# Altium PCB ISL6236A.PcbDoc
Units mm, origin at the board's own origin, x right, y up, seen from the top; angles counter-clockwise.
Board outline 50 x 50 mm, 6 copper layers (L1, L2, L3, L4, L5, L6); 41 components, 27 nets, 119 pads, 104 vias.
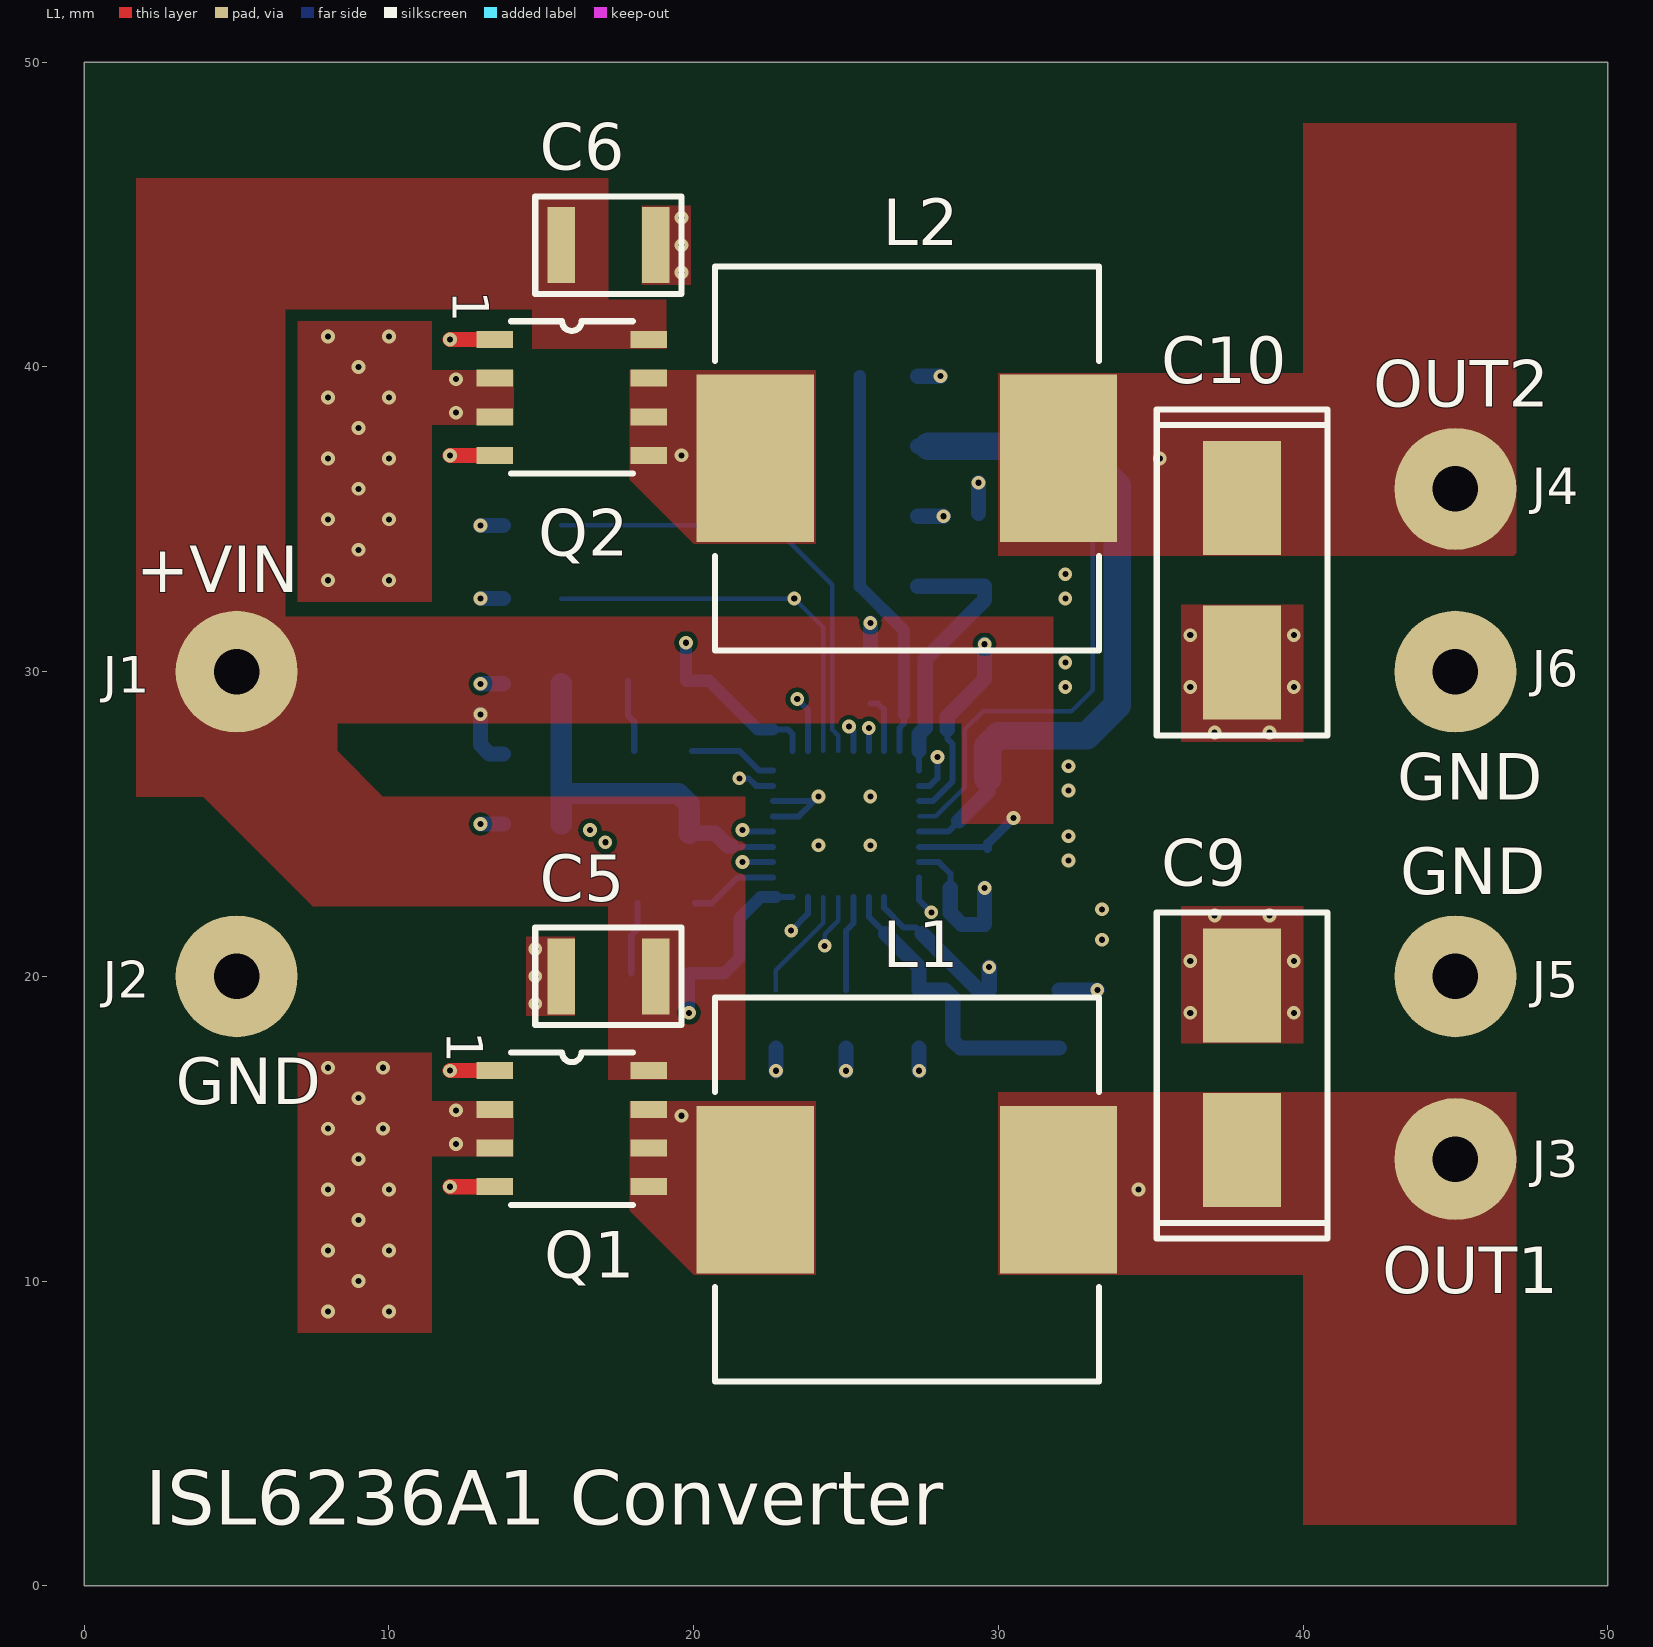
[diagram p0: L1 view]
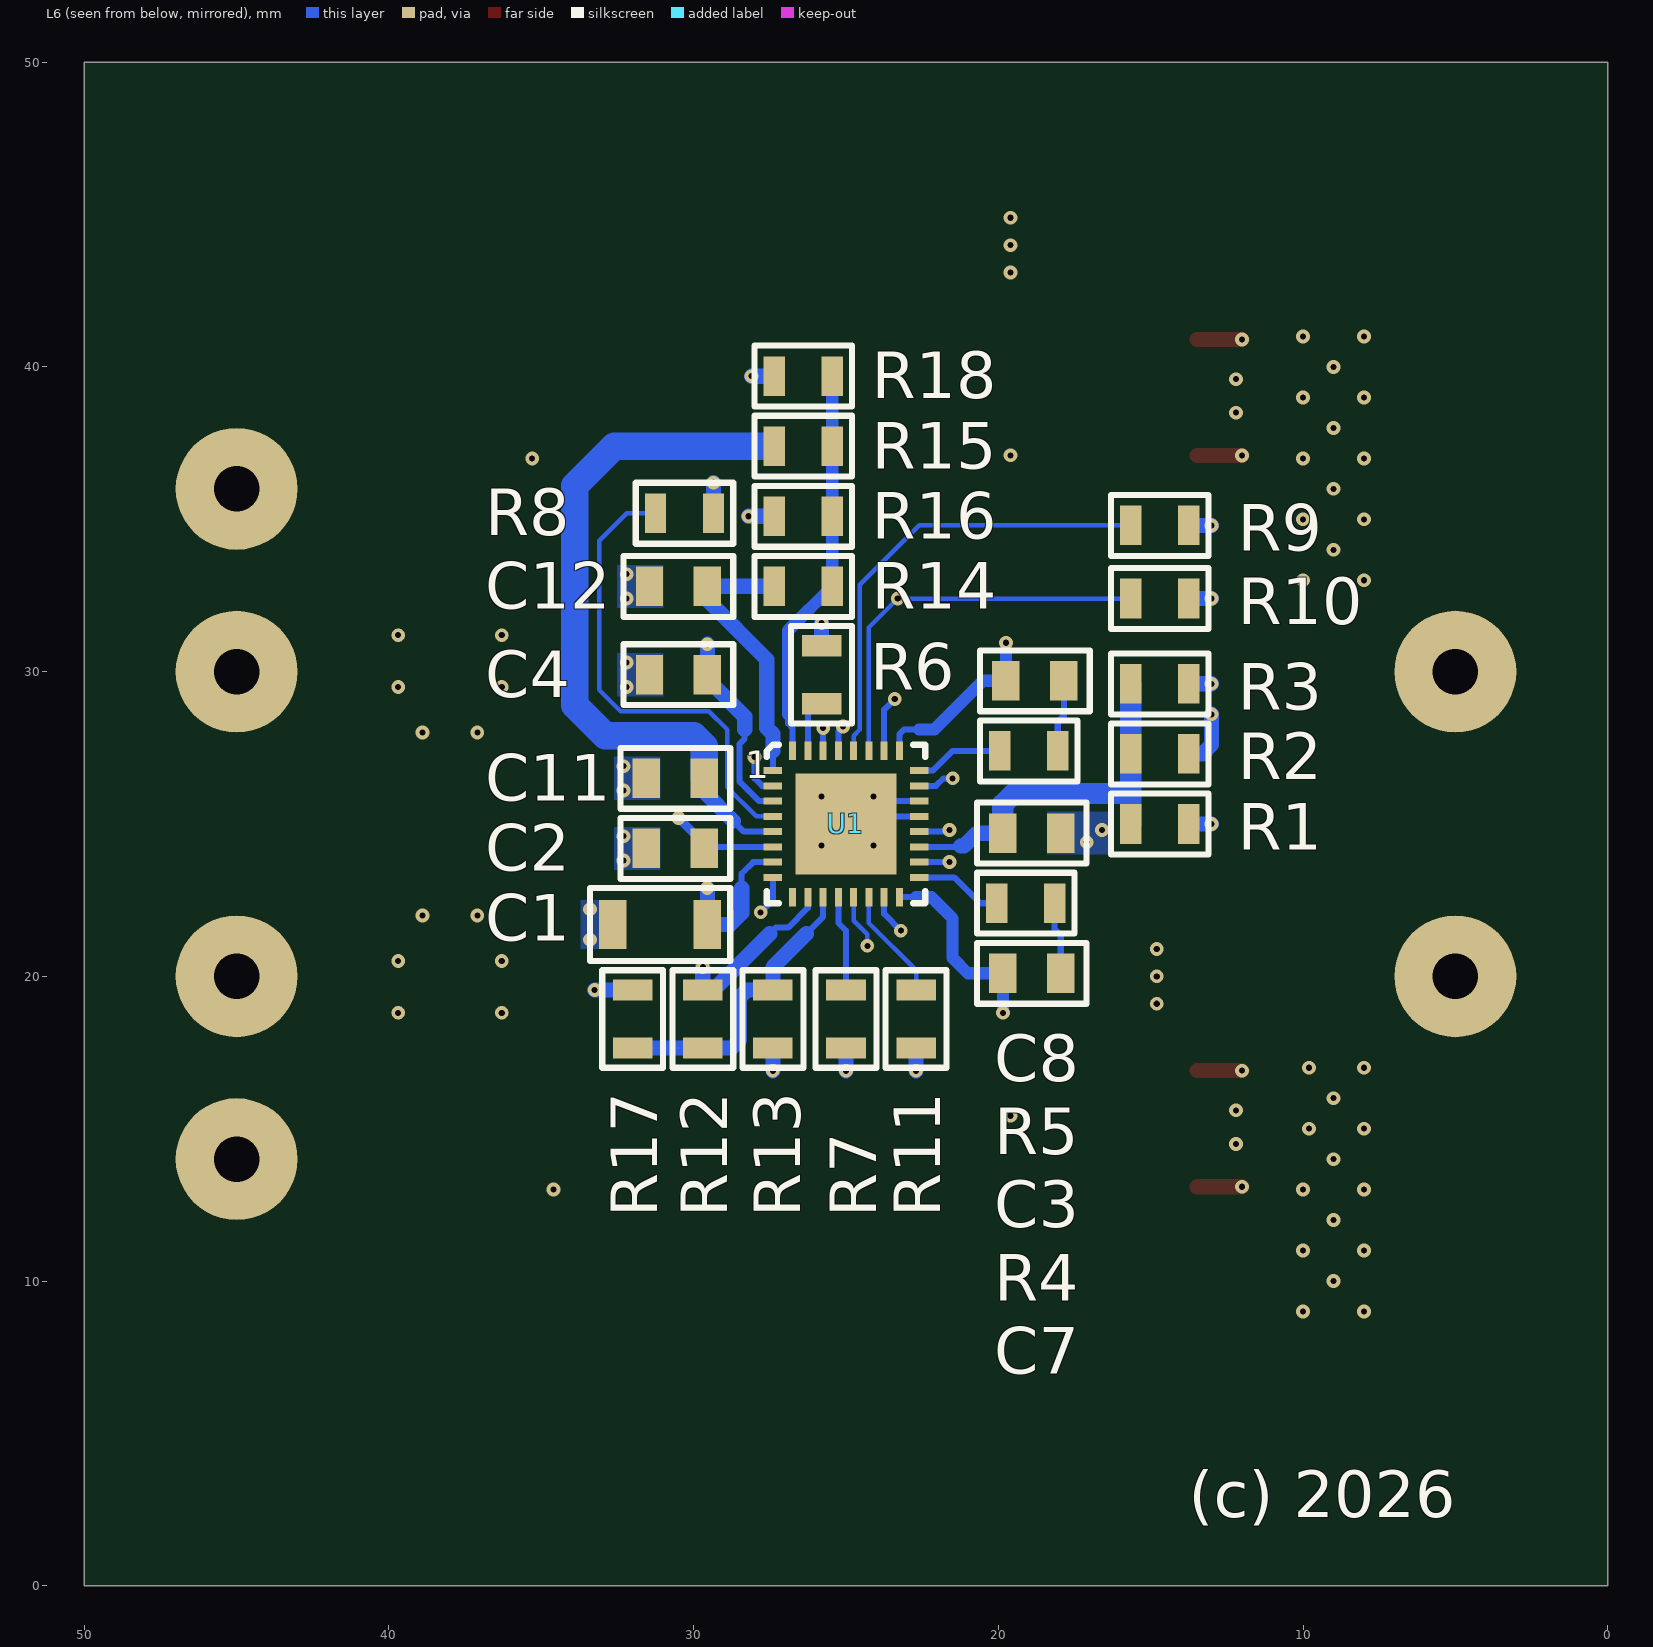
[diagram p1: L6 view, seen from below]
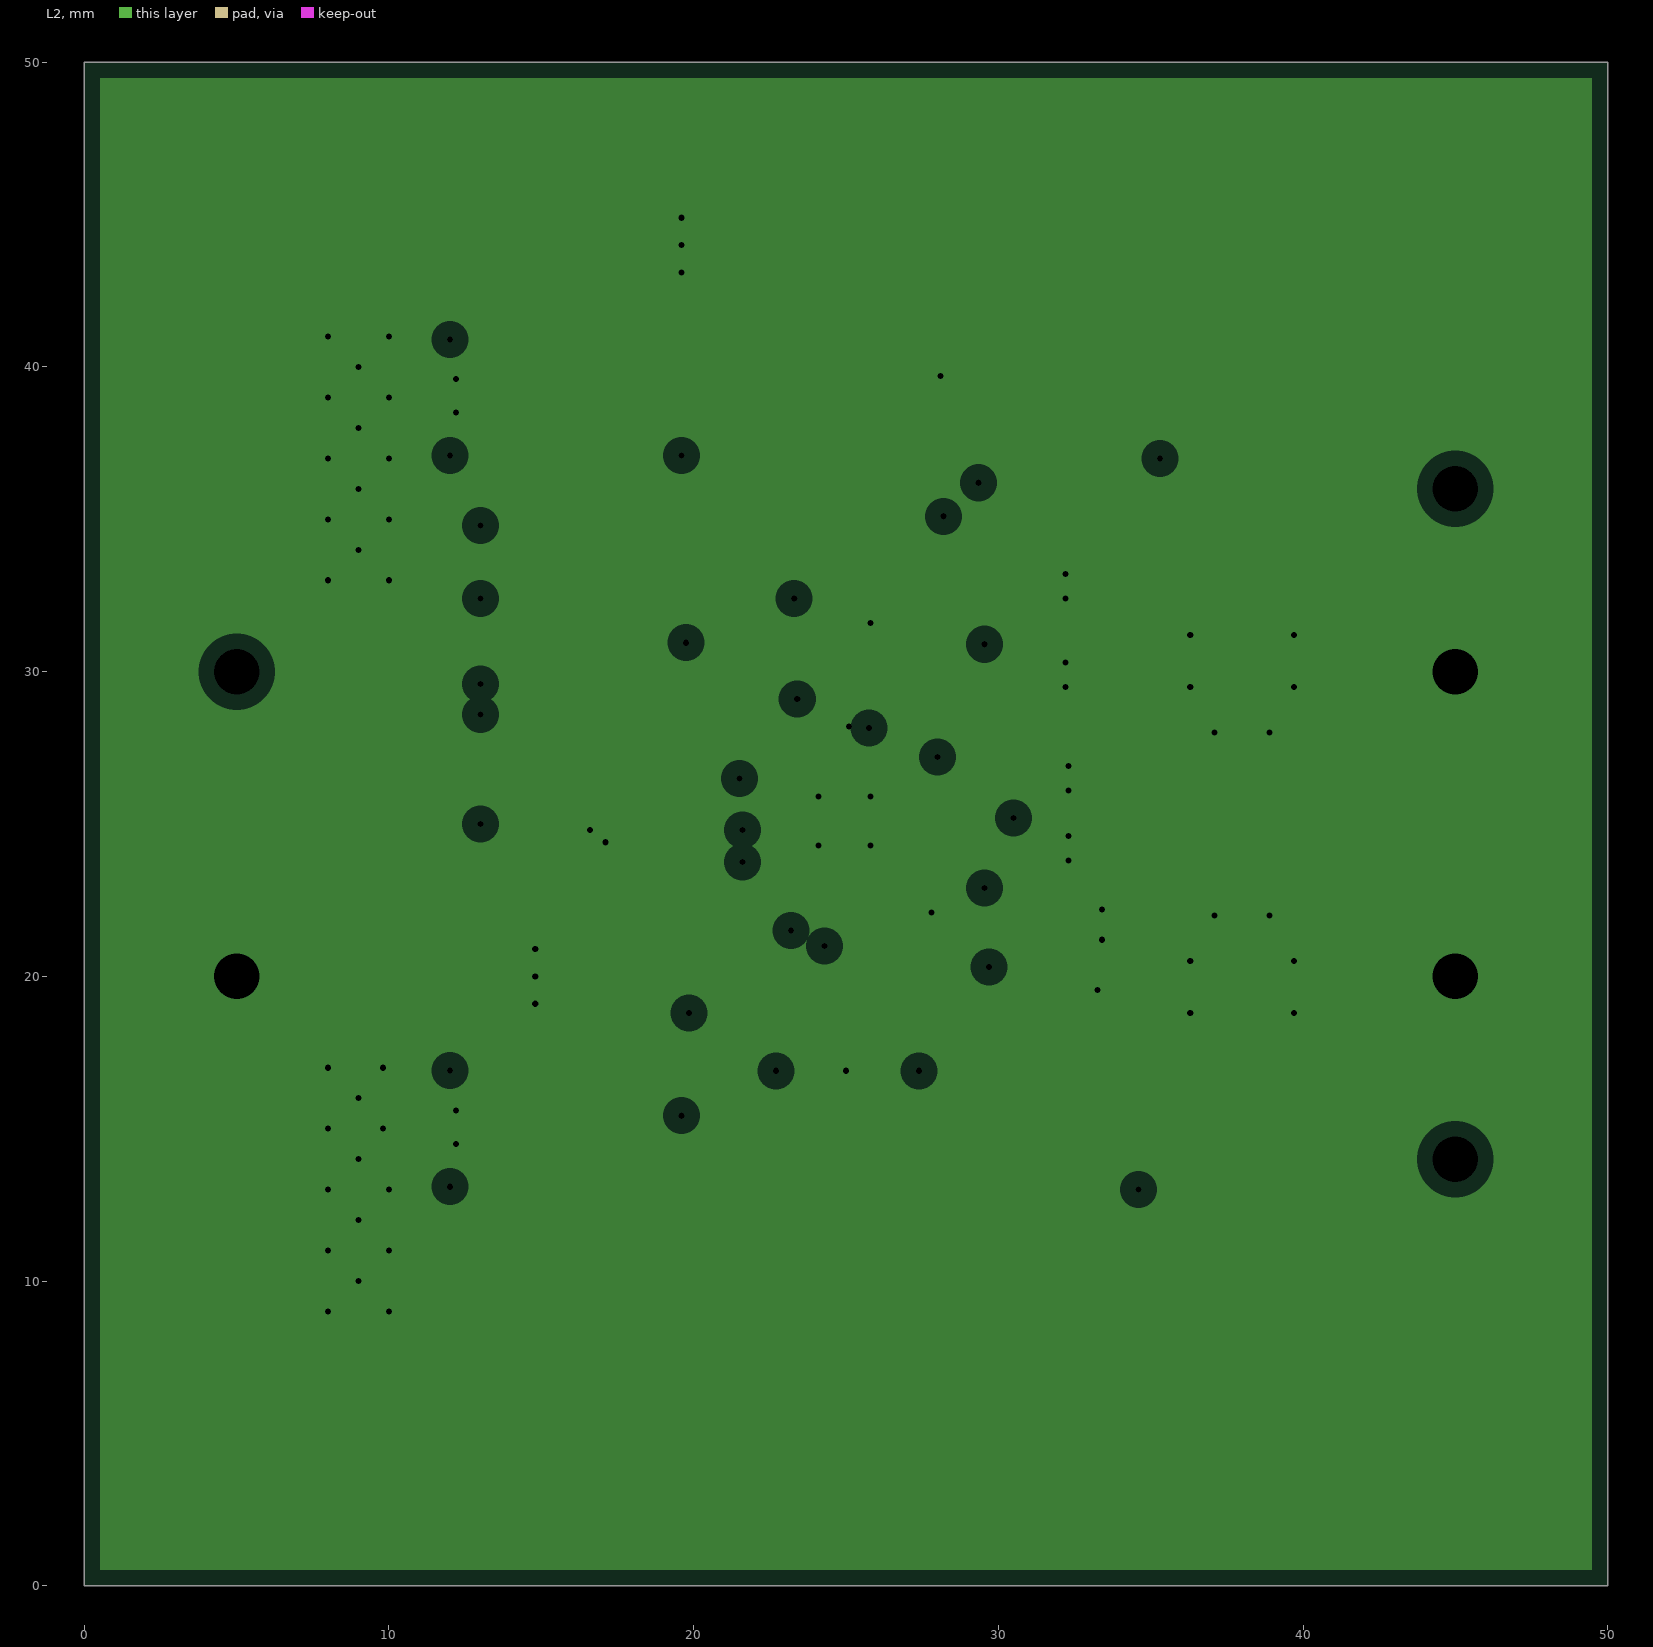
[diagram p2: L2, clearances drawn from the general rule]
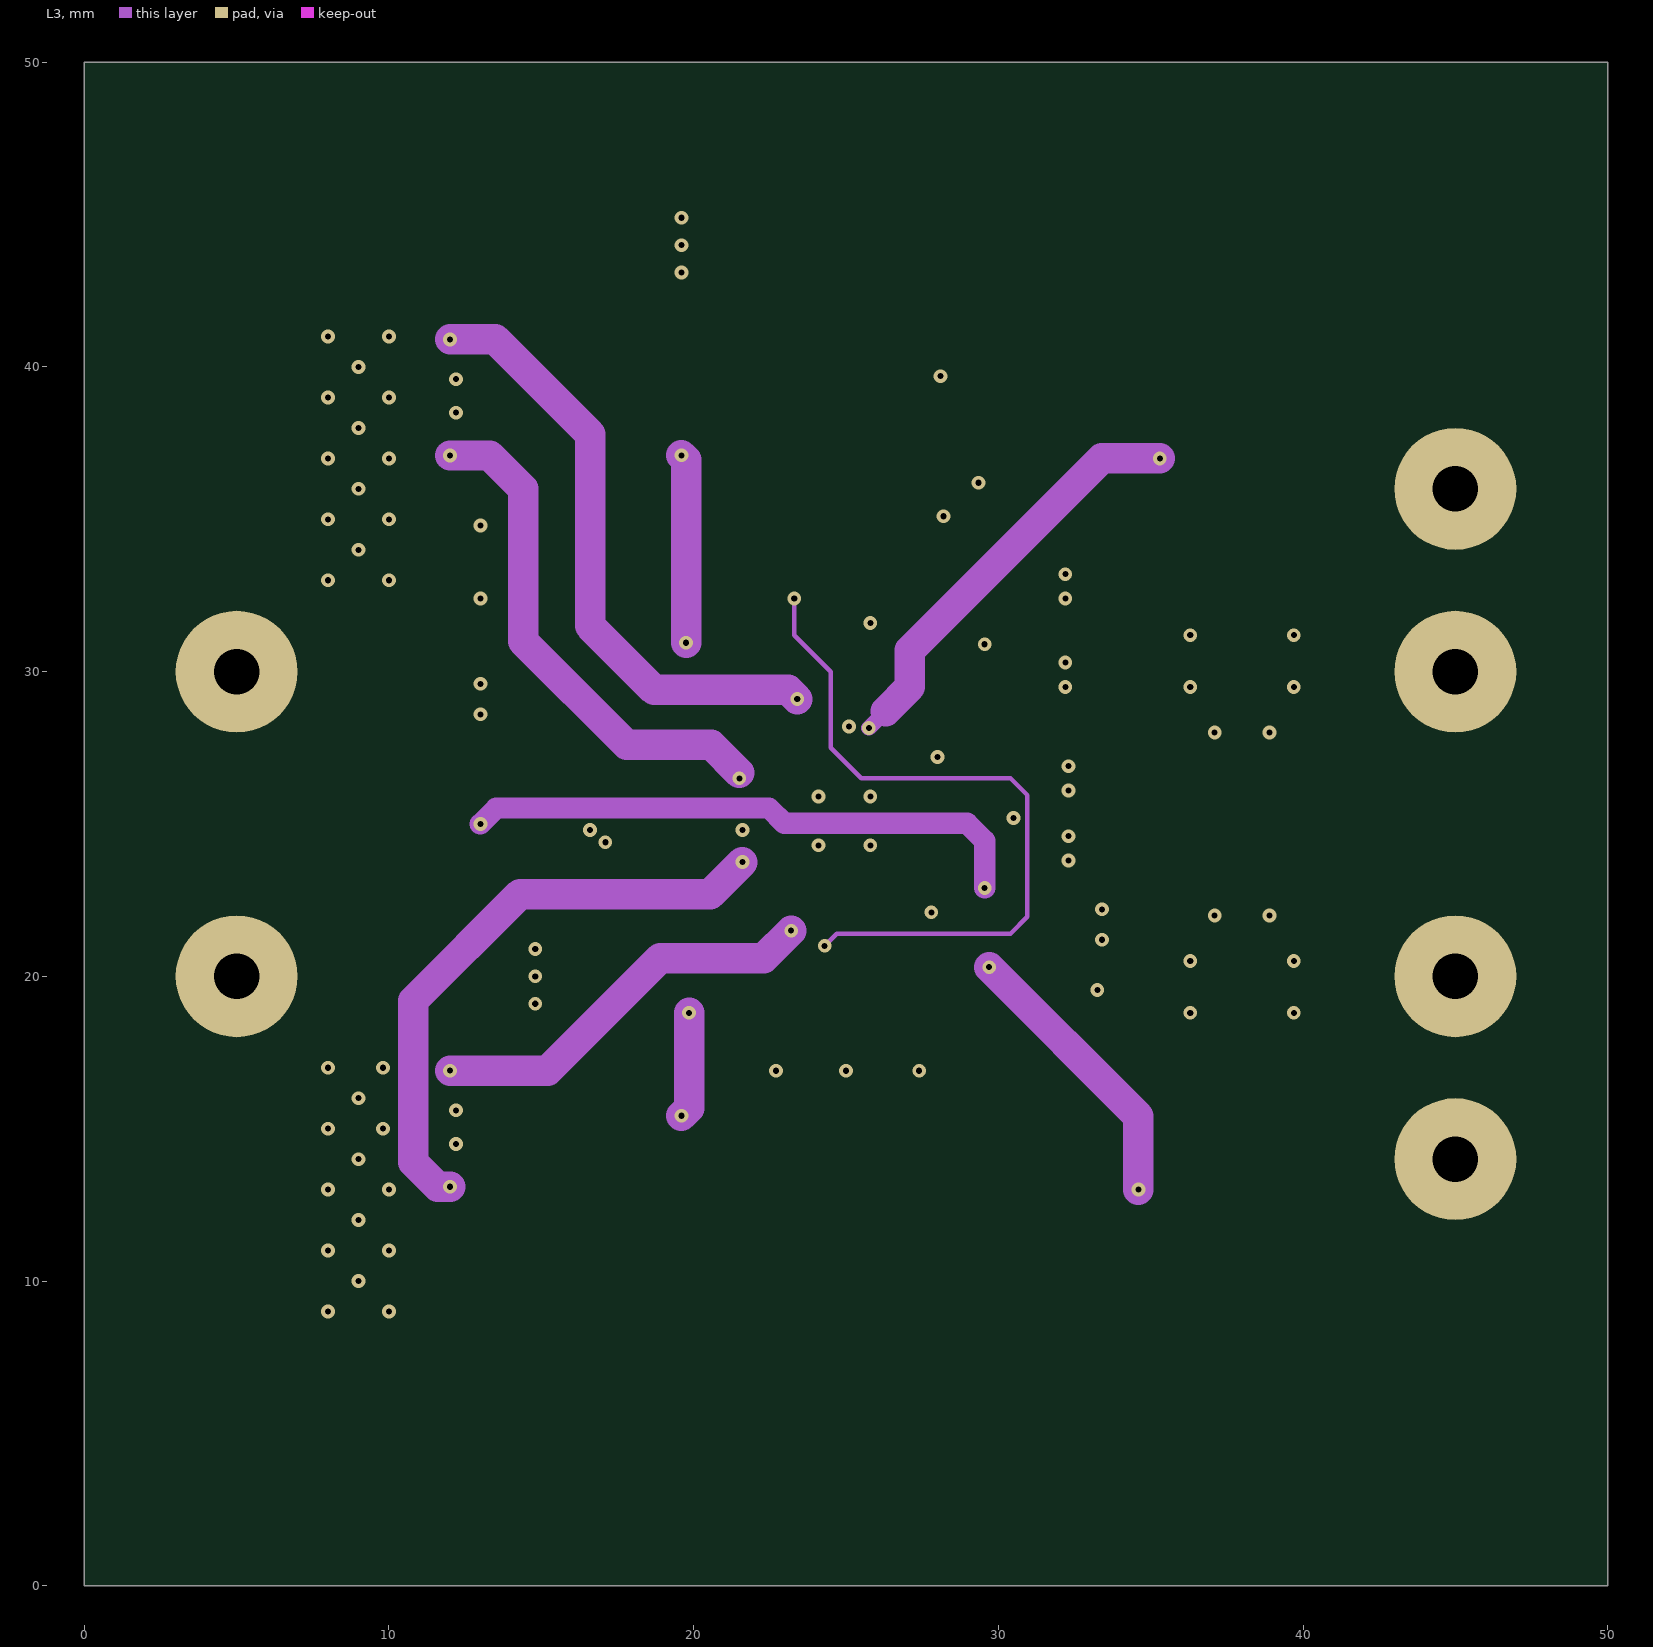
[diagram p3: L3]
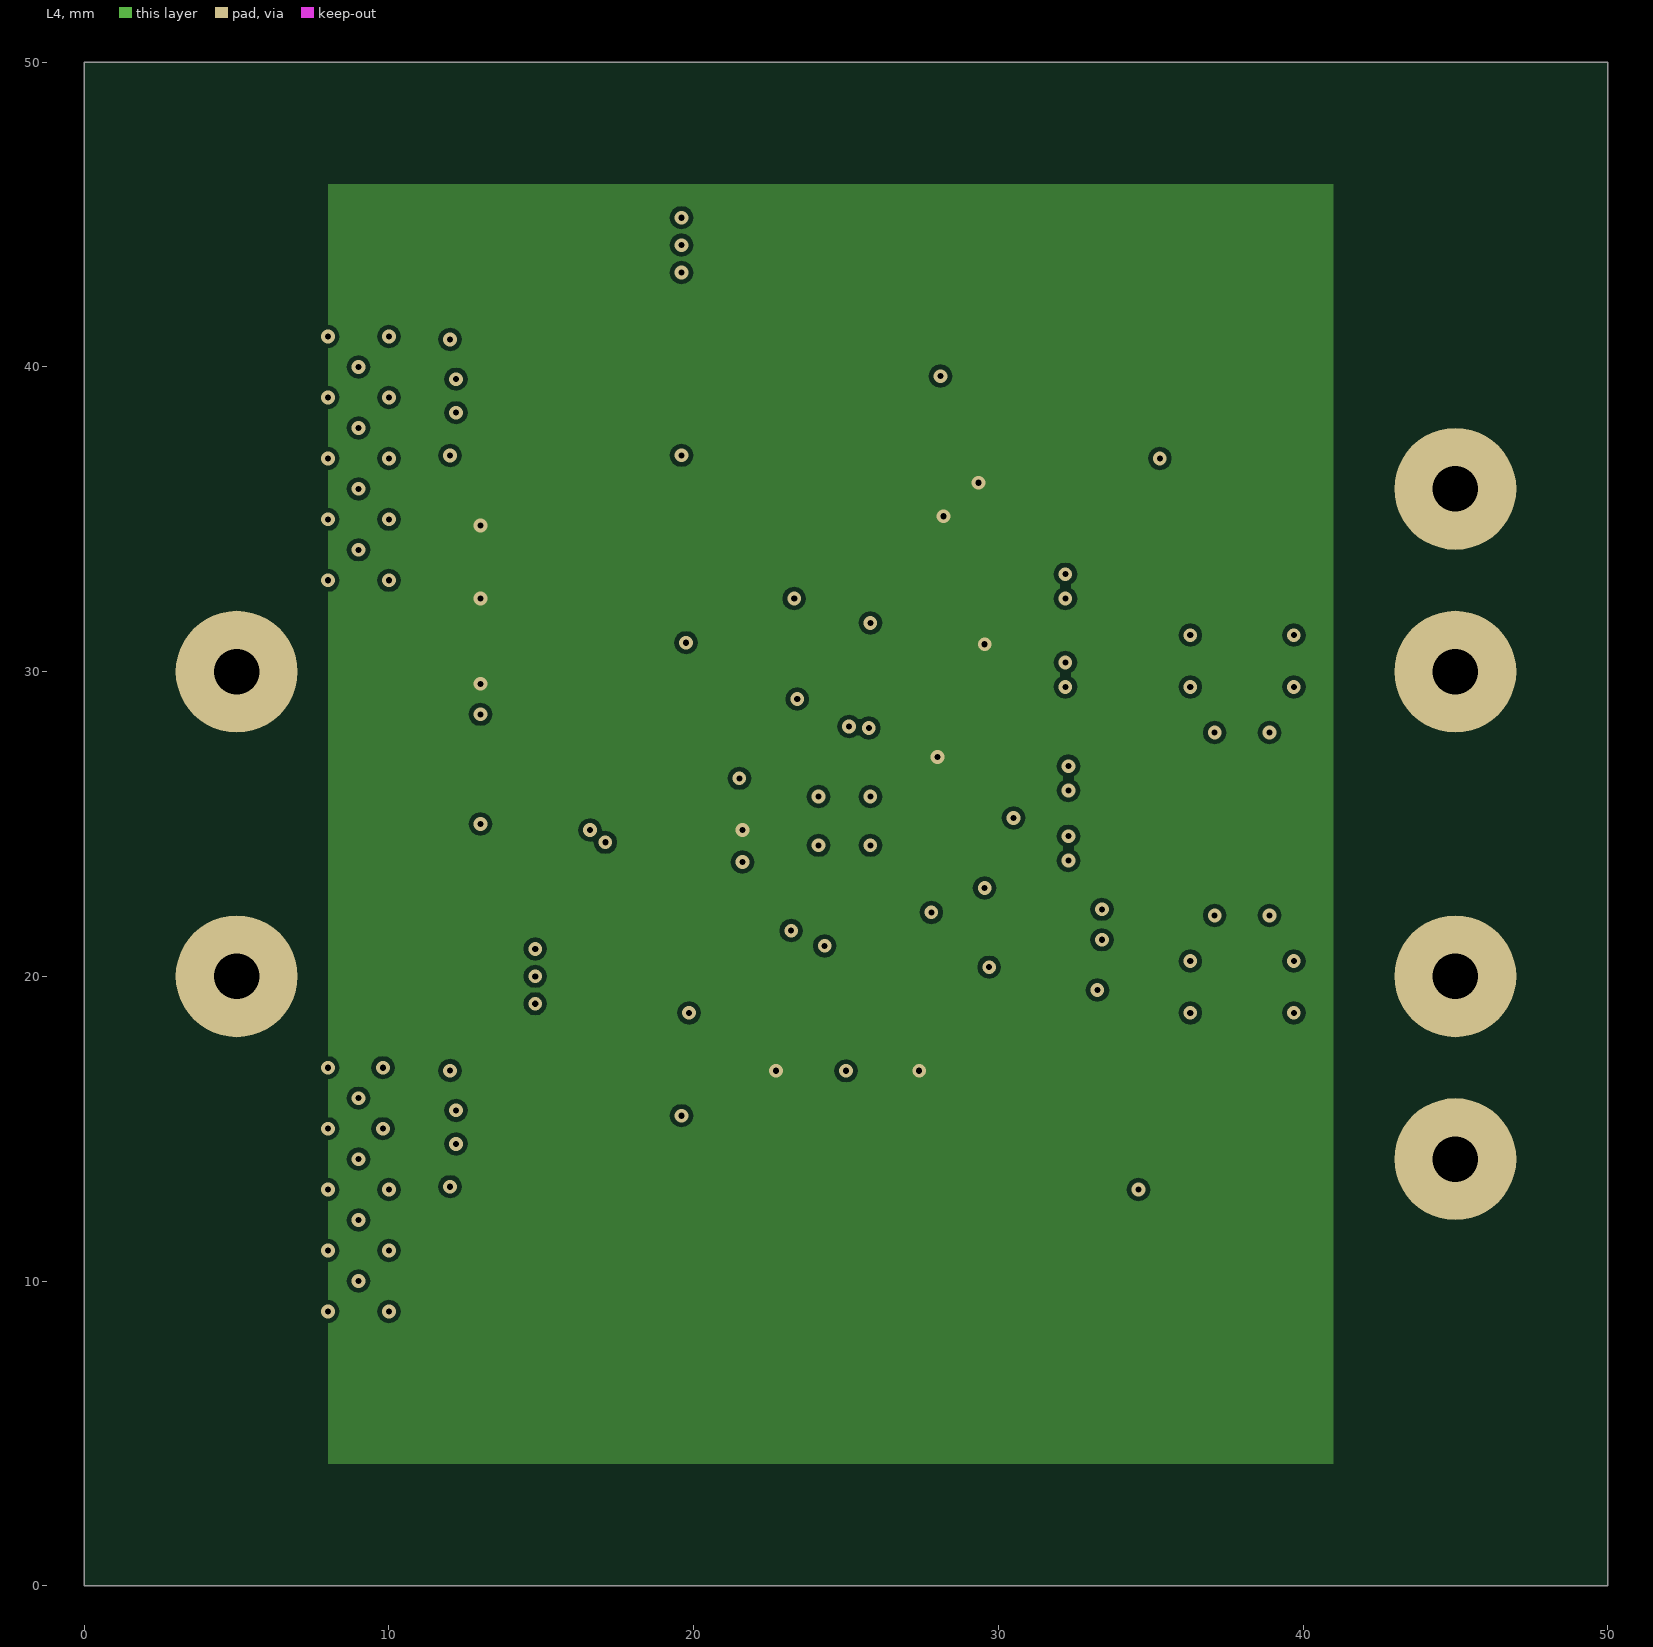
[diagram p4: L4]
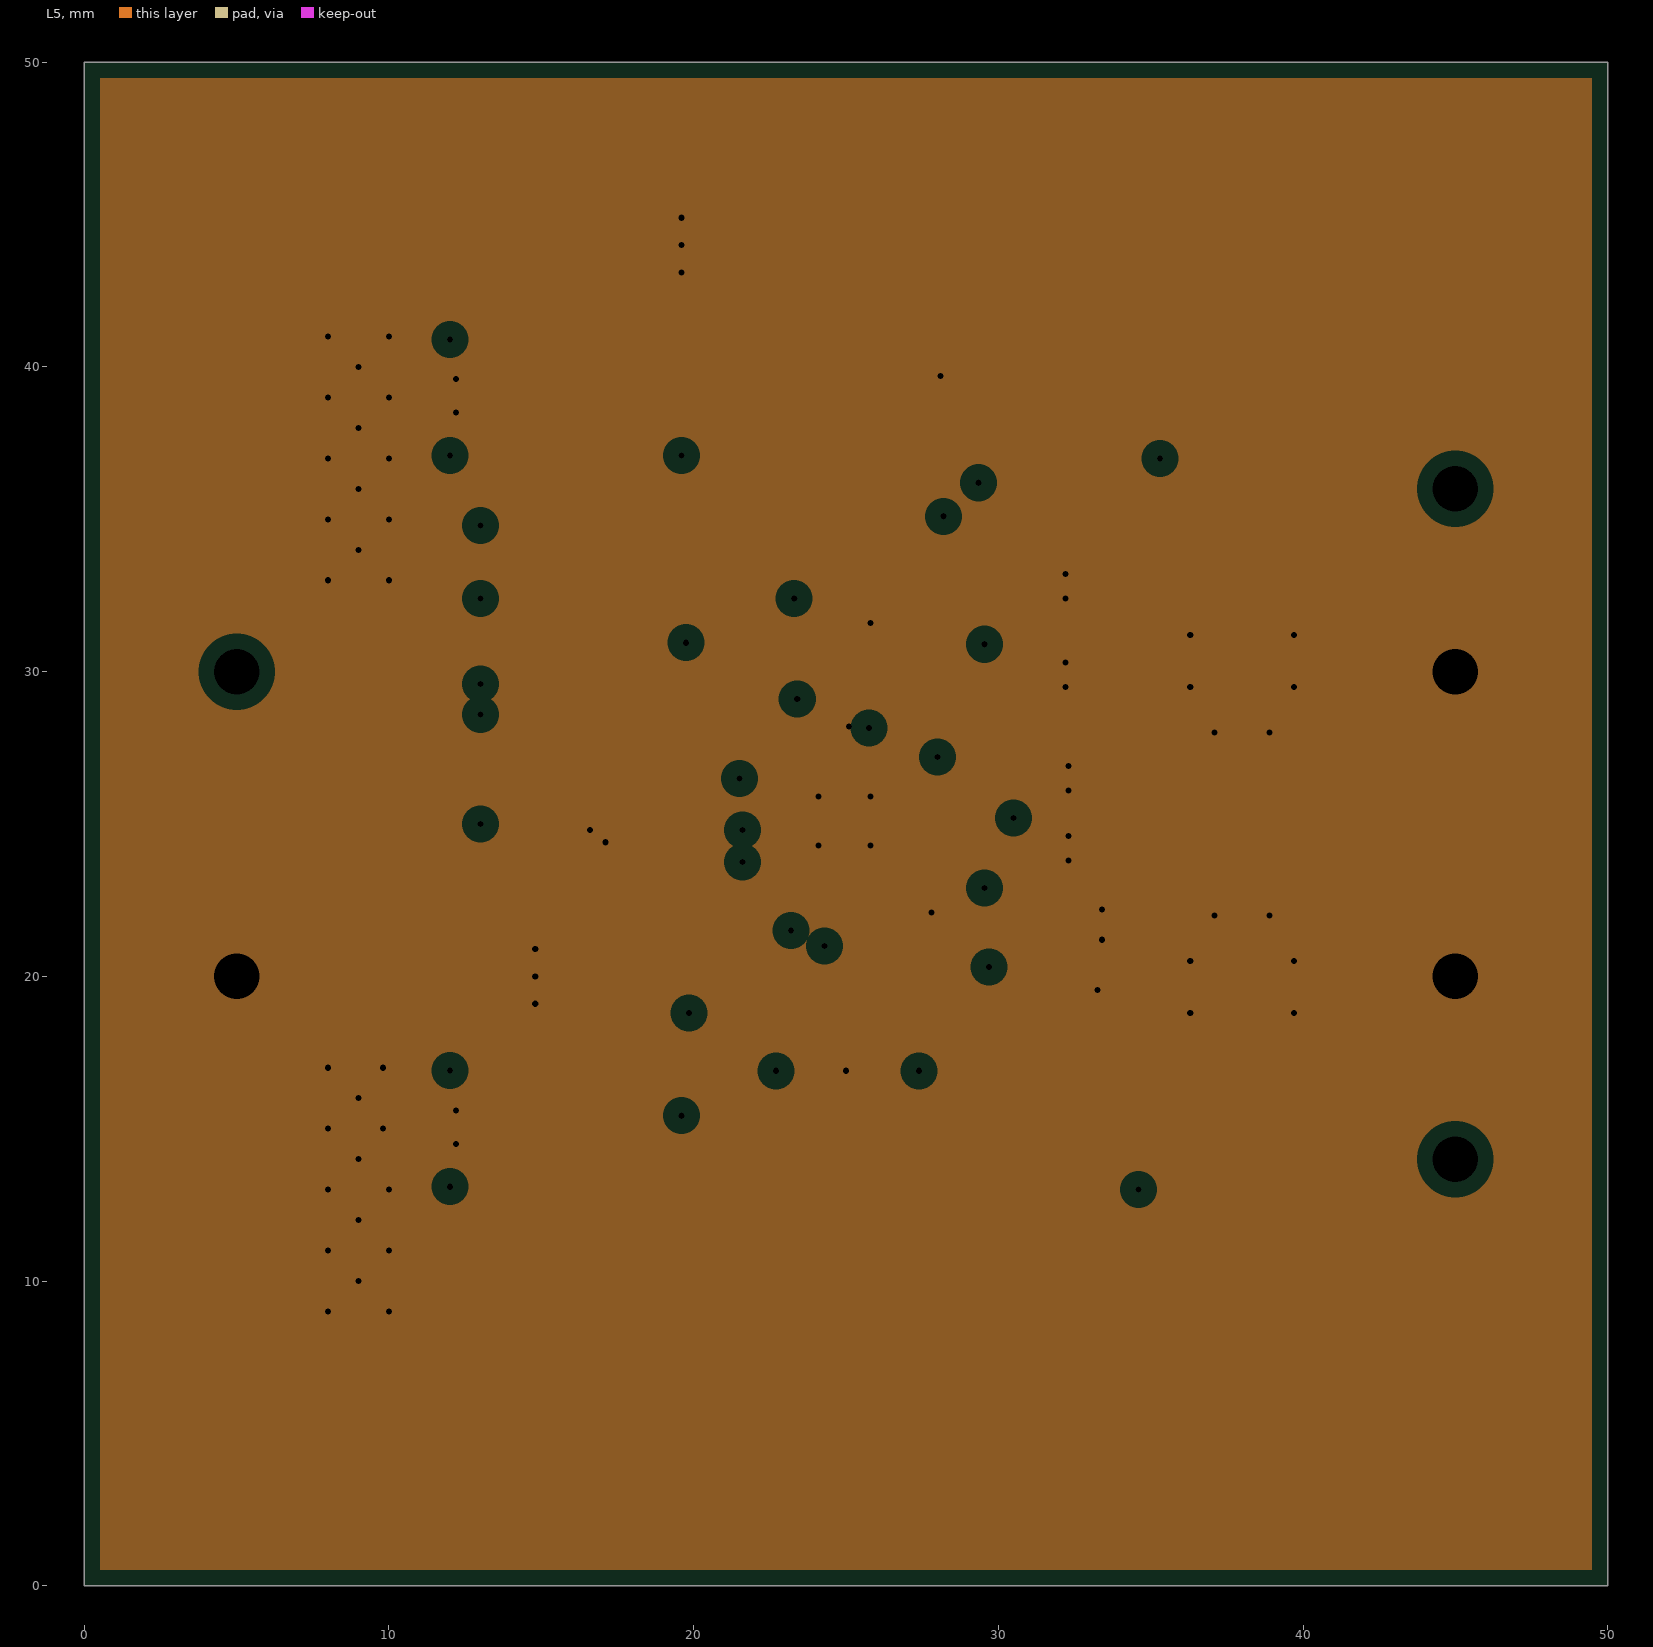
[diagram p5: L5, clearances drawn from the general rule]

## Layer stack, top to bottom
Top Solder: solder mask 0.0102, Solder Resist, Dk 3.5
L1: signal copper 0.0356
Dielectric1: core 0.32, FR-4, Dk 4.8
L2: plane copper 0.0356
Dielectric4: prepreg 0.32, FR-4, Dk 4.8
L3: signal copper 0.0356
Dielectric2: core 0.32, FR-4, Dk 4.8
L4: signal copper 0.0356
Dielectric3: prepreg 0.32, FR-4, Dk 4.8
L5: plane copper 0.0356
Dielectric5: core 0.32, FR-4, Dk 4.8
L6: signal copper 0.0356
Bottom Solder: solder mask 0.0102, Solder Resist, Dk 3.5

## Board outline
0,0 50,0 50,50 0,50 0,0

## Design rules (kind name [scope] priority, off if disabled: settings)
Clearance [All] p1: gap=0.15 ignorepadtopadclearanceinfootprint=FALSE except(0: Arc-Hole Track-Hole SMDPad-Hole THPad-Hole Via-Hole Fill-Hole Poly-Hole Region-Hole Text-Hole)
ComponentClearance [All] p1: gap=0.1 collisioncheckmode=3 verticalgap=0.1 showdistances=FALSE
HoleSize [All] p1: absolutevalues=TRUE maxlimit=10 minlimit=0.025 maxpercent=80.000 minpercent=20.000
MinimumSolderMaskSliver [All] p1: minsoldermaskwidth=0.1
PlaneClearance [All] p1: clearance=0.508
PlaneConnect PlaneConnect_VIA [isvia] p1: planeconnectstyle=Direct reliefexpansion=0.508 reliefentries=4 reliefconductorwidth=0.254 reliefairgap=0.254
PlaneConnect [All] p2: planeconnectstyle=Relief reliefexpansion=0.5 reliefentries=4 reliefconductorwidth=1 reliefairgap=0.254
PolygonConnect [All] p1: connectstyle=Direct reliefconductorwidth=0.254 reliefentries=4 polygonreliefangle="90 Angle" airgapwidth=0.254
RoutingVias [All] p1: holewidth=0.2 width=0.45 viastyle="Through Hole" minholewidth=0.1 minwidth=0.4 maxholewidth=10 maxwidth=10
SilkToSolderMaskClearance SilkscreenOverComponentPads [IsPad] p1: minsilkscreentomaskgap=0.1 clearancetoexposedcopper=TRUE
SolderMaskExpansion [All] p1: expansion=0.102 istentingtop=FALSE
Width [All] p1: maxlimit=10 minlimit=0.15 preferedwidth=0.15
24 further rules are at their usual default settings.

## Components (designator, comment, footprint, x,y, rotation, side; value= is the part's Value field where it differs from the comment)
C1 "4.7uF, 10V" C1206 31.1,21.7 r180 bottom
C2 "1uF, 50V" C0805 30.6,24.2 r180 bottom
C3 "1uF, 50V" C0805 18.9,24.7 r0 bottom
C4 "1uF, 50V" C0805 30.5,29.9 r180 bottom
C5 "10uF, 50V" C1210 17.2,20 r0 top
C6 "10uF, 50V" C1210 17.2,44 r180 top
C7 "100nF" C0805 18.9,20.1 r180 bottom
C8 "220nF" C0805 18.8,29.7 r0 bottom
C9 "330uF, 10V" 7343-43 38,17 r90 top
C10 "330uF, 10V" 7343-43 38,33 r270 top
C11 "10nF" C0805 30.6,26.5 r0 bottom
C12 "100nF" C0805 30.5,32.8 r0 bottom
J1 "4MMx1.5MM" PAD_WITH_HOLE_4MMx1.5MM#1 5,28 r0 top
J2 "4MMx1.5MM" PAD_WITH_HOLE_4MMx1.5MM#2 5,22 r0 top
J3 "4MMx1.5MM" PAD_WITH_HOLE_4MMx1.5MM#3 45,14 r0 top
J4 "4MMx1.5MM" PAD_WITH_HOLE_4MMx1.5MM#3 45,36 r0 top
J5 "4MMx1.5MM" PAD_WITH_HOLE_4MMx1.5MM#3 45,20 r0 top
J6 "4MMx1.5MM" PAD_WITH_HOLE_4MMx1.5MM#3 45,30 r0 top
L1 "3u3, DR125-3R3-R" DR125 27,13 r180 top locked
L2 "2u2, DR125-2R2-R" DR125 27,37 r0 top locked
Q1 "SI4816BDY-T1-GE3" SO-8 16,15 r0 top
Q2 "SI4816BDY-T1-GE3" SO-8 16,39 r0 top
R1 "0R" R0805 14.7,25 r180 bottom
R2 "0R" R0805 14.7,27.3 r0 bottom
R3 "10R" R0805 14.7,29.6 r180 bottom
R4 "1R" R0805 19.1,22.4 r0 bottom
R5 "1R" R0805 19,27.4 r180 bottom
R6 "200k" R0805 25.8,29.9 r90 bottom
R7 "200k" R0805 25,18.6 r90 bottom
R8 "10k" R0805 30.3,35.2 r180 bottom
R9 "200k" R0805 14.7,34.8 r180 bottom
R10 "200k" R0805 14.7,32.4 r180 bottom
R11 "10k" R0805 22.7,18.6 r270 bottom
R12 "DNF" R0805 29.7,18.6 r90 bottom
R13 "0R" R0805 27.4,18.6 r270 bottom
R14 "DNF" R0805 26.4,32.8 r0 bottom
R15 "0R" R0805 26.4,37.4 r0 bottom
R16 "DNF" R0805 26.4,35.1 r0 bottom
R17 "DNF" R0805 32,18.6 r270 bottom
R18 "DNF" R0805 26.4,39.7 r180 bottom
U1 "ISL6236AIRZ" L32.5x5B 25,25 r180 bottom

## Footprints (in the part's own frame and the unit in brackets; to place one, negate y for a bottom-side part, rotate by r counter-clockwise, add the part's x,y. Pads: shape width x height; smd on the part's side, far side on the other; paste and mask are expansions set on the pad)
7343-43 [mm]
  rect 3.75x2.55 smd: 1(-2.7,0) 2(2.7,0)
  silkscreen extent -5.6,-2.8 5.1,2.8
C0805 [mm]
  rect 0.9x1.3 smd: 1(-0.95,0) 2(0.95,0)
  silkscreen extent -1.8,-1 1.8,1
C1206 [mm]
  rect 0.9x1.6 smd: 1(-1.55,0) 2(1.55,0)
  silkscreen extent -2.3,-1.2 2.3,1.2
C1210 [mm]
  rect 0.9x2.5 smd: 1(-1.55,0) 2(1.55,0)
  silkscreen extent -2.4,-1.6 2.4,1.6
DR125 [mm]
  rect 3.85x5.5 smd: 1(-4.975,0) 2(4.975,0)
  silkscreen extent -6.3,-6.3 6.3,6.3
L32.5x5B [mm]
  rect 0.6x0.23 smd mask+0.051: 1(-2.4,1.75) 2(-2.4,1.25) 3(-2.4,0.75) 4(-2.4,0.25) 5(-2.4,-0.25) 6(-2.4,-0.75) 7(-2.4,-1.25) 8(-2.4,-1.75) 17(2.4,-1.75) 18(2.4,-1.25) 19(2.4,-0.75) 20(2.4,-0.25) 21(2.4,0.25) 22(2.4,0.75) 23(2.4,1.25) 24(2.4,1.75)
  rect 0.23x0.6 smd mask+0.051: 9(-1.75,-2.4) 10(-1.25,-2.4) 11(-0.75,-2.4) 12(-0.25,-2.4) 13(0.25,-2.4) 14(0.75,-2.4) 15(1.25,-2.4) 16(1.75,-2.4) 25(1.75,2.4) 26(1.25,2.4) 27(0.75,2.4) 28(0.25,2.4) 29(-0.25,2.4) 30(-0.75,2.4) 31(-1.25,2.4) 32(-1.75,2.4)
  rect 3.3x3.3 smd mask+0.051: 33(0,0)
  silkscreen extent -2.6,-2.6 2.6,2.6
PAD_WITH_HOLE_4MMx1.5MM#1 [mm]
  round 4 hole 1.5: 1(0,2)
PAD_WITH_HOLE_4MMx1.5MM#2 [mm]
  round 4 hole 1.5: 1(0,-2)
PAD_WITH_HOLE_4MMx1.5MM#3 [mm]
  round 4 hole 1.5: 1(0,0)
R0805 [mm]
  rect 0.7x1.3 smd: 1(-0.95,0) 2(0.95,0)
  silkscreen extent -1.6,-1 1.6,1
SO-8 [mm]
  rect 1.194x0.559 smd: 1(-2.527,1.905) 2(-2.527,0.635) 3(-2.527,-0.635) 4(-2.527,-1.905) 5(2.527,-1.905) 6(2.527,-0.635) 7(2.527,0.635) 8(2.527,1.905)
  silkscreen extent -2,-2.5 2,2.5

## Part data
C1: library part C3216X5R1A475K, "CAP CER 4.7UF 10V 10% X5R 1206"
C2 C3 C4: library part C2012X7R1H105K125AB, "CAP CER 1UF 50V 10% X7R 0805"
C5 C6: library part UMK325BJ106MM-T, "CAP CER 10UF 50V 20% X5R 1210"
C7 C12: library part C2012X7R1H104K085AA, "CAP CER 0.1UF 50V 10% X7R 0805"
C8: library part C2012X7R1H224K125AA, "CAP CER 0.22UF 50V 10% X7R 0805"
C9 C10: library part T530X337M010ATE004, "CAP TANT 330UF 10V 20% 2917"
C11: library part VJ0805Y103KNAAO, "CAP CER 10000PF 50V 10% X7R 0805"
J1 J2 J3 J4 J5 J6: library part PAD_WITH_HOLE_4MMx1.5MM, "Pad with a hole 4mm x 1.5mm"
L1: library part DR125-3R3-R, "INDUCTOR SHIELD PWR 3.3UH SMD"
L2: library part DR125-2R2-R, "INDUCTOR SHIELD PWR 2.2UH SMD"
Q1 Q2: "MOSFET DL N-CH 30V 6.8A 8-SOIC"
R1 R2 R13 R15: library part ERJ-6GEY0R00V, "RES 0.0 OHM 1/8W JUMP 0805 SMD"
R3: library part ERJ-6GEYJ100V, "RES 10 OHM 1/8W 5% 0805 SMD"
R4 R5: library part ERJ-6RQF1R0V, "RES 1 OHM 1/8W 1% 0805 SMD"
R6 R7 R9 R10: library part ERJ-6ENF2003V, "RES 200K OHM 1/8W 1% 0805 SMD"
R8 R11: library part ERJ-6GEYJ103V, "RES 10K OHM 1/8W 5% 0805 SMD"
R12 R14 R16 R17 R18: library part RES
U1: "IC MAIN PWR CTRLR QUAD 32-QFN"

## Via types
v1: diameter 0.45, hole 0.2, L1 to L6, 104 vias

## Nets (pads, with @x,y where several pads share a name; then routed paths per layer and width w, separated by ;. In a path a pad name is that pad's centre, name@x,y a point inside that pad or via, vN(x,y) a via of type N, cw(c..) or ccw(c..) an arc to the next point about the centre after c; other vN are vias at no path point)
+1V5: C9.1 J3.1 L1.1 R12.2 U1.10 | length 15
  L3 w1: v1(29.7,20.3) 34.6,15.4 v1(34.6,13)
  L6 w0.2: U1.10 26.25,22.25 26.9,21.6 27.3,21.6 27.5,21.4
  L6 w0.5: 27.5,21.4 29.35,19.55 R12.2 v1(29.7,20.3)
+1V05: C10.1 J4.1 L2.2 U1.30 | length 14.7
  L3 w0.5: v1(25.75,28.15) 26.3,28.7
  L3 w1: 26.3,28.7 27.1,29.5 27.1,30.7 33.4,37 v1(35.3,37)
  L6 w0.2: U1.30 v1(25.75,28.15)
+5V_LDO: C1.2 R1.2 U1.7 | length 24.5
  L3 w0.7: v1(13,25) 13.525,25.525 22.475,25.525 22.975,25.025 28.975,25.025 29.55,24.45 v1(29.55,22.9)
  L6 w0.2: U1.7 28.05,23.75 28.425,23.375 28.425,22.9
  L6 w0.5: v1(13,25) R1.2 ; 28.425,22.9 28.425,22.075 28.8,21.7 C1.2 v1(29.55,22.9)
+5V_PVCC: C3.2 R1.1 R2.2 R3.1 U1.19 | length 13
  L6 w0.2: 21.125,24.275 21.15,24.25 U1.19
  L6 w0.5: C3.2 20.7,24.7 21.125,24.275 21.241,24.275
  L6 w0.7: R1.1 15.65,26.1 ; R3.1 15.65,26.1 ; C3.2 19.85,25.65 19.5,26 15.75,26 15.65,26.1
+5V_VCC: C4.2 R3.2 R8.2 R9.2 R10.2 R11.2 R13.2 R16.2 U1.2 U1.3 U1.20 | length 14.5
  L6 w0.2: v1(21.6,24.8) 21.65,24.75 U1.20 ; U1.3 27.85,25.75 28.5,26.4 28.5,27.625 28.325,27.8 28.325,28.1 ; U1.2 27.75,26.25 28,26.5 v1(28,27.2)
  L6 w0.5: v1(13,29.6) R3.2 ; v1(13,32.4) R10.2 ; v1(13,34.8) R9.2 ; v1(22.7,16.9) R11.2 ; R16.2 v1(28.2,35.1) ; v1(27.4,16.9) R13.2 ; 28.325,28.1 28.325,28.525 29.55,29.75 C4.2 v1(29.55,30.9) ; R8.2 v1(29.35,36.2)
+REF: C12.1 R14.2 U1.1 | length 9.1
  L6 w0.2: U1.1 27.4,27.4
  L6 w0.5: R14.2 C12.1 29.55,32.35 27.6,30.4 27.6,28.15 27.4,27.95 27.4,27.4
+VIN: C2.2 C5.2 C6.2 J1.1 Q1.8 Q2.8 R2.1 U1.6 | length 5.5
  L6 w0.2: U1.6 29.6,24.25 C2.2
  L6 w0.3: C2.2 29.65,24.35 v1(30.5,25.2)
  L6 w0.5: v1(13,28.6) 13,27.6 13.3,27.3 R2.1
+VREF3: C11.1 R15.2 U1.5 | length 23.4
  L6 w0.2: U1.5 28.35,24.75 28.7,25.1
  L6 w0.5: R15.2 R15.2@27.7,37.4 ; 28.7,25.1 29.65,26.05 C11.1
  L6 w0.9: R15.2@27.7,37.4 32.6,37.4 33.9,36.1 33.9,28.9 32.9,27.9 30,27.9 29.65,27.55 C11.1
EN1: R11.1 U1.14 | length 3.7
  L6 w0.15: R11.1 22.7,20.2 24.25,21.75 U1.14
EN_LDO: R8.1 U1.4 | length 15.7
  L6 w0.15: U1.4 27.95,25.25 28.9,26.2 28.9,28.1 29.5,28.7 32.4,28.7 33.1,29.4 33.1,34.3 32.2,35.2 R8.1
FB1: R12.1 R13.1 R17.2 U1.11 | length 9.9
  L6 w0.2: U1.11 25.75,21.95 26.3,21.4
  L6 w0.5: 26.3,21.4 27.4,20.3 R13.1 28.25,19.55 28.5,19.3 28.5,17.9 28.75,17.65 R12.1 R17.2
GND: C1.1 C2.1 C3.1 C4.1 C5.1 C6.1 C9.2 C10.2 C11.2 C12.2 J2.1 J5.1 J6.1 Q1.2 Q1.3 Q2.2 Q2.3 R6.2 R7.1 R17.1 R18.1 U1.8 U1.21 U1.22 U1.29 U1.33 | length 8.8
  L6 w0.2: U1.21 23.45,25.25 U1.33@23.95,25.75 ; U1.22 U1.33@23.95,25.75 ; v1(24.1,25.9) U1.33@23.95,25.75 ; v1(25.1,28.2) 25.25,28.05 U1.29 ; U1.8 27.4,22.5 v1(27.8,22.1)
  L6 w0.5: v1(25,16.9) R7.1 ; R6.2 v1(25.8,31.6) ; R18.1 v1(28.1,39.7) ; R17.1 v1(33.25,19.55)
  other v1: 8,9 10,9 9,10 8,11 10,11 9,12 8,13 10,13 9,14 12.2,14.5 8,15 9.8,15 12.2,15.6 9,16 8,17 9.8,17 36.3,18.8 39.7,18.8 14.8,19.1 14.8,20 36.3,20.5 39.7,20.5 14.8,20.9 33.4,21.2 37.1,22 38.9,22 33.4,22.2 32.3,23.8 24.1,24.3 25.8,24.3 17.1,24.4 32.3,24.6 16.6,24.8 25.8,25.9 32.3,26.1 32.3,26.9 37.1,28 38.9,28 32.2,29.5 36.3,29.5 39.7,29.5 32.2,30.3 36.3,31.2 39.7,31.2 32.2,32.4 8,33 10,33 32.2,33.2 9,34 8,35 10,35 9,36 8,37 10,37 9,38 12.2,38.5 8,39 10,39 12.2,39.6 9,40 8,41 10,41 19.6,43.1 19.6,44 19.6,44.9
LGATE1: Q1.4 U1.18 | length 22.1
  L1 w0.5: v1(12.005,13.095) Q1.4
  L3 w0.3: v1@21.6,23.7 v1@21.7,23.7
  L3 w1: v1(12.005,13.095) 11.605,13.095 10.8,13.9 10.8,19.2 14.3,22.7 20.55,22.7 v1(21.6,23.75)
  L6 w0.2: v1(21.6,23.75) U1.18
LGATE2: Q2.4 U1.23 | length 19.4
  L1 w0.5: v1(12.005,37.095) Q2.4
  L3 w1: v1(12.005,37.095) 13.305,37.095 14.4,36 14.4,31 17.8,27.6 20.575,27.6 v1@21.5,26.675
  L6 w0.2: v1(21.5,26.5) 21.8,26.5 22.05,26.25 U1.23
NetC7_2: C7.2 R4.1 | length 2.4
  L6 w0.2: C7.2 17.95,21.35 18.15,21.55 R4.1
NetC8_1: C8.1 R5.2 | length 2.4
  L6 w0.2: C8.1 17.85,28.55 18.05,28.35 R5.2
NetR4_2: R4.2 U1.17 | length 2.9
  L6 w0.2: R4.2 20.6,22.4 21.45,23.25 U1.17
NetR5_1: R5.1 U1.24 | length 2.9
  L6 w0.2: R5.1 21.5,27.4 22.15,26.75 U1.24
NetR6_1: R6.1 U1.31 | length 1.9
  L6 w0.2: R6.1 26.05,28.95 26.25,28.75 U1.31
NetR7_2: R7.2 U1.12 | length 3.2
  L6 w0.2: R7.2 25,21.5 25.25,21.75 U1.12
PHASE1: C7.1 L1.2 Q1.5 Q1.6 Q1.7 U1.16 | length 10
  L3 w1: v1(19.6,15.425) 19.85,15.675 v1(19.85,18.8)
  L6 w0.2: 22.7,22.6 U1.16
  L6 w0.4: v1(19.85,18.8) C7.1 21,20.1 21.5,20.6 21.5,21.9 22.2,22.6 22.7,22.6
PHASE2: C8.2 L2.1 Q2.5 Q2.6 Q2.7 U1.25 | length 12.2
  L3 w1: v1(19.6,37.1) 19.75,36.95 v1(19.75,30.95)
  L6 w0.2: 22.6,28.1 23.1,28.1 23.25,27.95 U1.25
  L6 w0.4: v1(19.75,30.95) C8.2 20.5,29.7 22.1,28.1 22.6,28.1
POK1: R10.1 U1.13 U1.27 | length 38.4
  L3 w0.15: v1(23.3,32.4) 23.3,31.2 24.5,30 24.5,27.5 25.5,26.5 30.4,26.5 30.95,25.95 30.95,21.95 30.4,21.4 24.7,21.4 v1(24.3,21)
  L6 w0.15: R10.1 v1(23.3,32.4) 24.25,31.45 U1.27 ; v1(24.3,21) 24.3,21.376 24.75,21.826 U1.13
POK2: R9.1 U1.28 | length 15.2
  L6 w0.15: R9.1 22.6,34.8 24.55,32.85 24.55,28.1 24.75,27.9 U1.28
REFIN2: R14.1 R15.1 R16.1 R18.2 U1.32 | length 13
  L6 w0.2: U1.32 26.75,28.15 26.9,28.3 26.9,28.6
  L6 w0.4: R18.2 R15.1 R16.1 R14.1 26.9,31.35 26.9,28.6
UGATE1: Q1.1 U1.15 | length 15.9
  L1 w0.5: v1(12.005,16.905) Q1.1
  L3 w1: v1(12.005,16.905) 15.205,16.905 18.9,20.6 22.3,20.6 v1(23.2,21.5)
  L6 w0.2: v1(23.2,21.5) 23.75,22.05 U1.15
UGATE2: Q2.1 U1.26 | length 23.3
  L1 w0.5: v1(12.005,40.905) Q2.1
  L3 w1: v1(12.005,40.905) 13.495,40.905 16.6,37.8 16.6,31.5 18.7,29.4 23.1,29.4 v1(23.4,29.1)
  L6 w0.2: v1(23.4,29.1) 23.75,28.75 U1.26
pads on no net: U1.9

## Polygon pours and split planes (outlines as drawn)
PHASE1 on L1 "L06_PWR-No Net" (solid, pour order 20): 18,15.9 24,15.9 24,10.2 20,10.2 17.9,12.3 17.9,15.9 18,15.9
PHASE2 on L1 "L06_PWR-No Net" (solid, pour order 19): 17.9,39.9 24,39.9 24,34.2 20,34.2 17.9,36.3 17.9,39.9
+VIN on L1 "L06_PWR-No Net" (solid, pour order 23): 21.7,16.6 21.7,25.9 9.8,25.9 8.3,27.4 8.3,28.3 28.8,28.3 28.8,25 31.8,25 31.8,31.8 6.6,31.8 6.6,41.9 14.7,41.9 14.7,40.6 19.1,40.6 19.1,42.2 17.2,42.2 17.2,46.2 1.7,46.2 1.7,25.9 3.9,25.9 7.5,22.3 17.2,22.3 17.2,16.6
GND on L1 "L06_PWR-No Net" (solid, pour order 25): 18.3,45.3 19.9,45.3 19.9,42.7 18.3,42.7 18.3,45.3
GND on L1 "L06_PWR-No Net" (solid, pour order 24): 16.1,18.7 14.5,18.7 14.5,21.3 16.1,21.3 16.1,18.7
GND on L1 "L06_PWR-No Net" (solid, pour order 27): 36,32.2 36,27.7 40,27.7 40,32.2
GND on L1 "L06_PWR-No Net" (solid, pour order 26): 40,17.8 40,22.3 36,22.3 36,17.8
GND on L1 "L06_PWR-No Net" (solid, pour order 35): 14.1,39.9 11.4,39.9 11.4,41.5 7,41.5 7,32.3 11.4,32.3 11.4,38.1 14.1,38.1 14.1,39.9
GND on L1 "L06_PWR-No Net" (solid, pour order 34): 14.1,15.9 11.4,15.9 11.4,17.5 7,17.5 7,8.3 11.4,8.3 11.4,14.1 14.1,14.1 14.1,15.9
+1V05 on L1 "L06_PWR-No Net" (solid, pour order 22): 30,39.8 40,39.8 40,48 47,48 47,33.8 30,33.8
+1V5 on L1 "L06_PWR-No Net" (solid, pour order 21): 30,10.2 40,10.2 40,2 47,2 47,16.2 30,16.2
GND on L6 "L06_PWR-No Net" (solid, pour order 31): 31,33.5 32.5,33.5 32.5,32.1 31,32.1 31,33.5
GND on L6 "L06_PWR-No Net" (solid, pour order 30): 31,30.6 32.5,30.6 32.5,29.2 31,29.2 31,30.6
GND on L6 "L06_PWR-No Net" (solid, pour order 29): 31.1,27.2 32.6,27.2 32.6,25.8 31.1,25.8 31.1,27.2
GND on L6 "L06_PWR-No Net" (solid, pour order 28): 31.1,24.9 32.6,24.9 32.6,23.5 31.1,23.5 31.1,24.9
GND on L6 "L06_PWR-No Net" (solid, pour order 32): 32.3,22.5 33.7,22.5 33.7,20.9 32.3,20.9 32.3,22.5
GND on L6 "L06_PWR-No Net" (solid, pour order 33): 18.4,25.4 16.3,25.4 16.3,24 18.4,24
+5V_VCC on L4 "L06_PWR-No Net" (solid, pour order 36): 8,46 8,4 41,4 41,46 8,46
GND on L5 (split plane): 49.49,0.51 0.51,0.51 0.51,49.49 49.49,49.49
GND on L2 (split plane): 49.49,0.51 0.51,0.51 0.51,49.49 49.49,49.49

## Other copper
L1:

## Silkscreen, mask and mechanical layers (free items; w line width, h text height)
Top Overlay:
  text "1" at 12.1,42.5 h1.2 r270
  text "OUT2" at 42.3,38.7 h1.52
  text "+VIN" at 1.7,32.6 h1.52
  text "GND" at 43.1,25.8 h1.52
  text "GND" at 43.2,22.7 h1.52
  text "1" at 11.9,18.2 h1.2 r270
  text "GND" at 3,15.8 h1.52
  text "OUT1" at 42.6,9.6 h1.52
  text "ISL6236A1 Converter" at 2,2 h1.8
Bottom Overlay:
  text "1" at 28.3,26.5 h0.9
  text "(c) 2026" at 13.746,2.254 h1.52
Top Solder:
Board Outline:
  the board outline again, w0.254